# EAGLE board Photon_I2C_Shield (EAGLE 7.6.0)
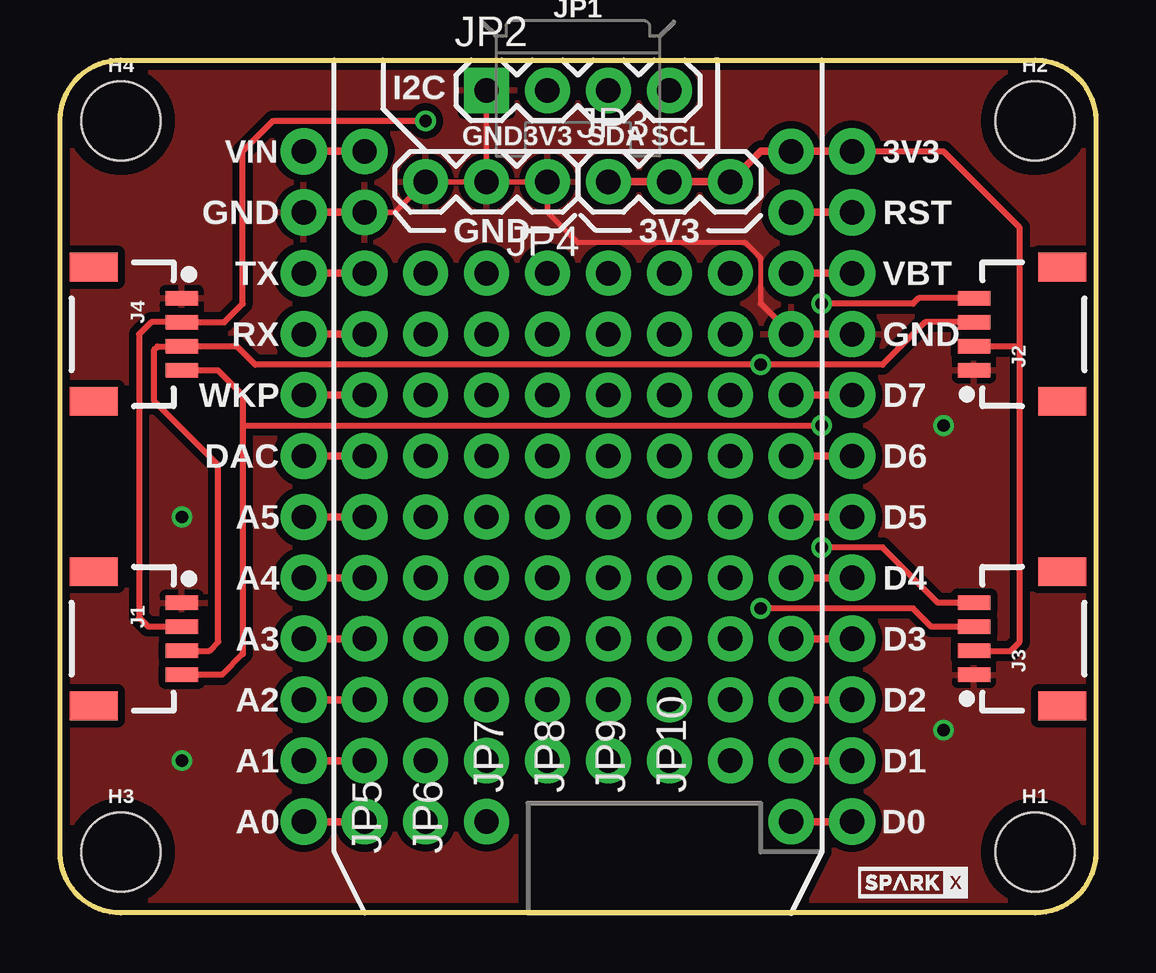
[diagram p0: board, top side]
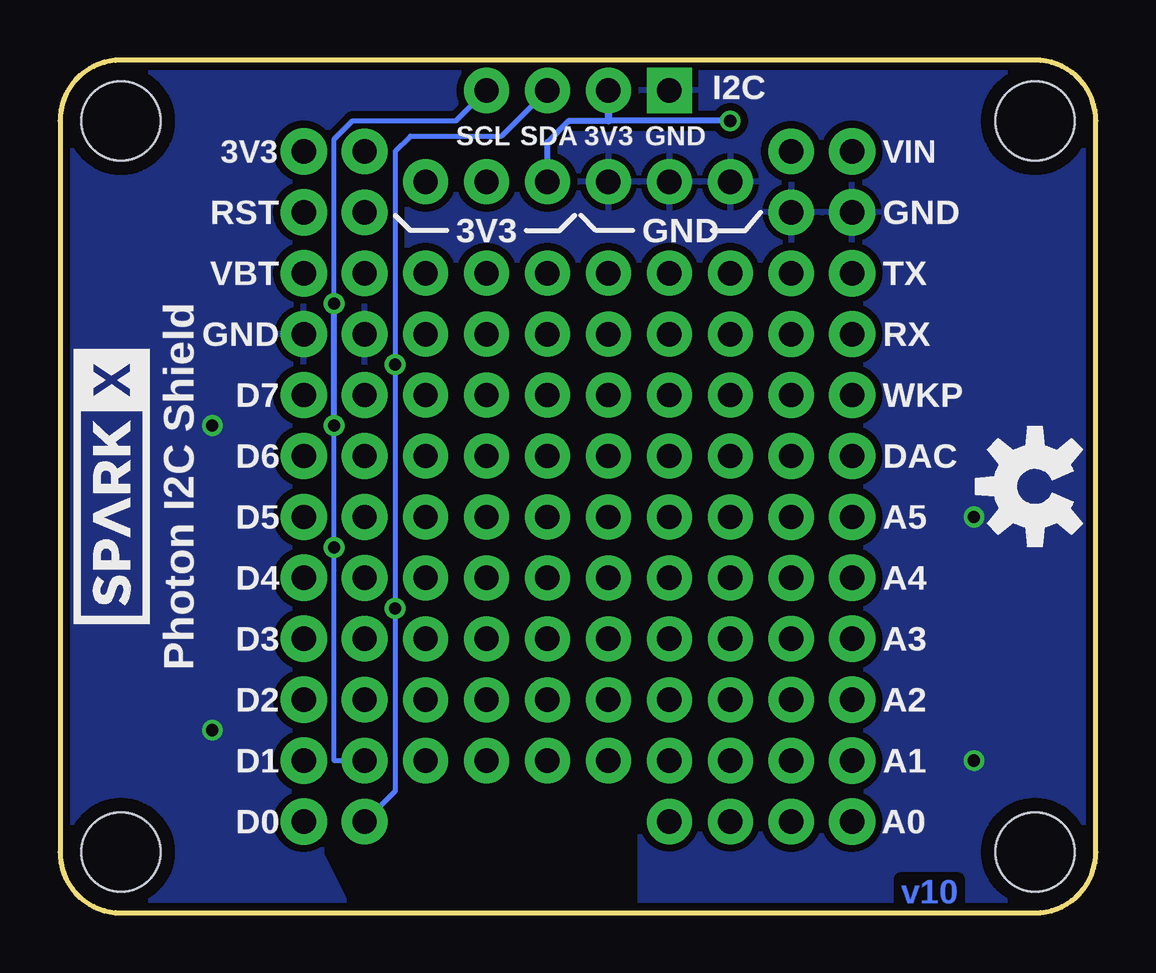
[diagram p1: board, bottom side, seen from below]

Size 43.18 x 35.56 mm. Coordinates in mm from the lower left corner, seen from the top.
Outline: 0,2.54 0,33.02 arc-90 2.54,35.56 40.64,35.56 arc-90 43.18,33.02 43.18,2.54 arc-90 40.64,0 2.54,0 arc-90 0,2.54
Copper layers (1*16): Top 0.035mm / dielectric 1.5mm / Bottom 0.035mm
Design rules "SparkFun-2-layer-TIGHT": minimum track width 7mil, minimum drill 15mil, track to track 7mil, track to pad 7mil, pad to pad 7mil, via to via 7mil, smd to smd 7mil, copper to edge 7mil, drill to drill 7mil, minimum pad ring 7mil, minimum via ring 7mil, stop-mask expansion 4mil, vias tented up to drill 25mil, thermal gap 10mil

## Footprints (pad centres in the part's own frame; a part is rotated, then mirrored left to right if it is on the bottom)
STAND-OFF = hole 3.302: 0,0
1X04_1MM_RA = smd 0.6 x 1.35: 1 -1.5,0; 2 -0.5,0; 3 0.5,0; 4 1.5,0 | smd 1.2 x 2: NC1 2.8,-3.675; NC2 -2.8,-3.675
PARTICLE_PHOTON_TEMPLATE_NO_STANDOFF = drill 1.016 pad 1.905: 1 -8.89,12.7; 2 -8.89,10.16; 3 -8.89,7.62; 4 -8.89,5.08; 5 -8.89,2.54; 6 -8.89,0; 7 -8.89,-2.54; 8 -8.89,-5.08; 9 -8.89,-7.62; 10 -8.89,-10.16; 11 -8.89,-12.7; 12 -8.89,-15.24; 13 8.89,-15.24; 14 8.89,-12.7; 15 8.89,-10.16; 16 8.89,-7.62; 17 8.89,-5.08; 18 8.89,-2.54; 19 8.89,0; 20 8.89,2.54; 21 8.89,5.08; 22 8.89,7.62; 23 8.89,10.16; 24 8.89,12.7 | drill 1.016 pad 1.93: 3V3 11.43,12.7; A0 -11.43,-15.24; A1 -11.43,-12.7; A2 -11.43,-10.16; A3 -11.43,-7.62; A4 -11.43,-5.08; A5 -11.43,-2.54; D0 11.43,-15.24; D1 11.43,-12.7; D2 11.43,-10.16; D3 11.43,-7.62; D4 11.43,-5.08; D5 11.43,-2.54; D6 11.43,0; D7 11.43,2.54; DAC -11.43,0; GND@0 -11.43,10.16; GND@2 11.43,5.08; RST 11.43,10.16; RX -11.43,5.08; TX -11.43,7.62; VBAT 11.43,7.62; VIN -11.43,12.7; WKP -11.43,2.54
1X04 = drill 1.016 pad 1.88 square: 1 0,0 | drill 1.016 pad 1.88: 2 2.54,0; 3 5.08,0; 4 7.62,0
1X03 = drill 1.016 pad 1.88: 1 0,0; 2 2.54,0; 3 5.08,0
1X10_NO_SILK = drill 1.016 pad 1.88: 1 0,0; 2 2.54,0; 3 5.08,0; 4 7.62,0; 5 10.16,0; 6 12.7,0; 7 15.24,0; 8 17.78,0; 9 20.32,0; 10 22.86,0
1X09_NO_SILK = drill 1.016 pad 1.88: 1 0,0; 2 2.54,0; 3 5.08,0; 4 7.62,0; 5 10.16,0; 6 12.7,0; 7 15.24,0; 8 17.78,0; 9 20.32,0

## Placement (x,y rotation side)
FRAME1  FRAME-LETTER  [CREATIVE_COMMONS]  -11.43,-12.7 0 top  (outside the outline)
H1  STAND-OFF  [STAND-OFF]  40.64,2.54 0 top
H2  STAND-OFF  [STAND-OFF]  40.64,33.02 0 top
H3  STAND-OFF  [STAND-OFF]  2.54,2.54 0 top
H4  STAND-OFF  [STAND-OFF]  2.54,33.02 0 top
J1  [1X04_1MM_RA]  5.08,11.43 270 top
J2  [1X04_1MM_RA]  38.1,24.13 90 top
J3  [1X04_1MM_RA]  38.1,11.43 90 top
J4  [1X04_1MM_RA]  5.08,24.13 270 top
JP1  PARTICLE_PHOTONTEMPLATE_NO_STANDOFF  [PARTICLE_PHOTON_TEMPLATE_NO_STANDOFF]  21.59,19.05 0 top
JP2  [1X04]  17.78,34.29 0 top
JP3  [1X03]  22.86,30.48 0 top
JP4  [1X03]  20.32,30.48 180 top
JP5  [1X10_NO_SILK]  15.24,3.81 90 top
JP6  [1X10_NO_SILK]  17.78,3.81 90 top
JP7  [1X09_NO_SILK]  20.32,6.35 90 top
JP8  [1X09_NO_SILK]  22.86,6.35 90 top
JP9  [1X09_NO_SILK]  25.4,6.35 90 top
JP10  [1X09_NO_SILK]  27.94,6.35 90 top
LOGO1  OSHW-LOGOM  [OSHW-LOGO-M]  2.54,17.78 90 bottom
U$1  [SPARKX-TINY]  35.56,1.27 0 top
U$4  SPARKX-LOGO5  [SPARKX-LARGE]  41.02,17.78 90 bottom

## Library data of the parts
FRAME1 LOGO1 = SparkFun-Aesthetics
H1-H4 = SparkFun-Hardware
J1-J4 U$1 U$4 = SparkX
JP1 = SparkFun-Boards
JP2-JP4 JP7-JP10 = SparkFun-Connectors
JP5 JP6 = SparkFun-Connectors; PROD_ID: CONN-11563

## Nets
A0: JP1.12 JP1.A0
A1: JP1.11 JP1.A1
A2: JP1.10 JP1.A2
A3: JP1.9 JP1.A3
A4: JP1.8 JP1.A4
A5: JP1.7 JP1.A5
D2: JP1.15 JP1.D2
D3: JP1.16 JP1.D3
D4: JP1.17 JP1.D4
D5: JP1.18 JP1.D5
D6: JP1.19 JP1.D6
D7: JP1.20 JP1.D7
DAC: JP1.6 JP1.DAC
GND: J1.1 J2.1 J3.1 J4.1 JP1.2 JP1.21 JP1.GND@0 JP1.GND@2 JP2.1 JP4.1 JP4.2 JP4.3
RST: JP1.23 JP1.RST
RX: JP1.4 JP1.RX
SCL: J1.4 J2.4 J3.4 J4.4 JP1.14 JP1.D1 JP2.4
SDA: J1.3 J2.3 J3.3 J4.3 JP1.13 JP1.D0 JP2.3
TX: JP1.3 JP1.TX
VBAT: JP1.22 JP1.VBAT
VCC: J1.2 J2.2 J3.2 J4.2 JP1.3V3 JP1.24 JP2.2 JP3.1 JP3.2 JP3.3
VIN: JP1.1 JP1.VIN
WKP: JP1.5 JP1.WKP

## Tracks (layer width: path | path; a pad name or v marks a point on that pad's centre or on a via)
GND  (via drill 0.51)
  Top 0.203: JP1.2 13.97,29.21 JP4.3 JP4.2 | JP4.2 JP4.1 20.32,29.21 21.59,27.94 28.57,27.94 29.21,27.3 29.21,25.4 | JP4.2 JP2.1
  Top 0.254: 29.21,25.4 JP1.21
  other vias: 36.83,20.32 36.83,7.62 5.08,16.51 5.08,6.35
  pour Top (isolate 0.305): 0,35.56 0,0 43.18,0 43.18,35.56
  pour Bottom (isolate 0.305): 0,35.56 0,0 43.18,0 43.18,35.56
SCL  (via drill 0.51)
  Top 0.254: J3.4 36.6,12.93 34.29,15.24 v31.75,15.24 | J2.4 35.79,25.63 35.56,25.4 v31.75,25.4 | J4.4 6.58,22.63 7.62,21.59 7.62,20.32 | 7.62,20.32 7.62,10.79 6.75,9.93 J1.4 | 7.62,20.32 v31.75,20.32
  Bottom 0.203: v31.75,20.32 v31.75,15.24 31.75,6.35 JP1.14 | v31.75,25.4 31.75,32.26 30.99,33.02 26.67,33.02 JP2.4
  Bottom 0.254: v31.75,20.32 v31.75,25.4
SDA  (via drill 0.51)
  Top 0.254: J3.3 36.33,11.93 35.56,12.7 v29.21,12.7 | J2.3 36.06,24.63 34.29,22.86 v29.21,22.86 8.14,22.86 7.37,23.63 J4.3 4.06,23.62 3.94,23.5 3.94,21.34 6.6,18.67 6.6,11.3 6.23,10.93 J1.3
  Bottom 0.203: JP1.13 29.21,5.08 v29.21,12.7 v29.21,22.86 29.21,31.75 28.57,32.38 24.77,32.38 JP2.3
VCC  (via drill 0.51)
  Top 0.254: J3.2 39.63,10.93 40.01,11.3 40.01,23.62 | 40.01,23.62 40.01,28.57 36.83,31.75 JP1.3V3 | 40.01,23.62 J2.2 | J1.2 arc90 J1.2 3.68,11.94 3.3,12.32 3.3,24.13 3.8,24.63 J4.2 6.85,24.63 7.62,25.4 7.62,31.75 8.89,33.02 v15.24,33.02
  Top 0.305: JP1.24 29.21,31.75 JP3.3 JP3.2 JP3.1
  Bottom 0.254: v15.24,33.02 20.32,33.02 21.98,33.02 22.86,32.14 JP3.1
  Bottom 0.305: 20.32,33.02 JP2.2

## Text on the board
Bottom: v10
tPlace: I2C | GND | 3V3 | SDA | SCL | GND | 3V3
bPlace: I2C | GND | 3V3 | SDA | SCL | GND | 3V3 | Photon I2C Shield
Measures: Units in Inches
tDocu: Joel Bartlett